# Altium PCB M26_M_V2.0.1.PcbDoc
Units mil, origin at the board's own origin, x right, y up, seen from the top; angles counter-clockwise.
Board outline 1771.65 x 1771.65 mil, 2 copper layers (Top Layer, Bottom Layer); 74 components, 43 nets, 212 pads, 89 vias.
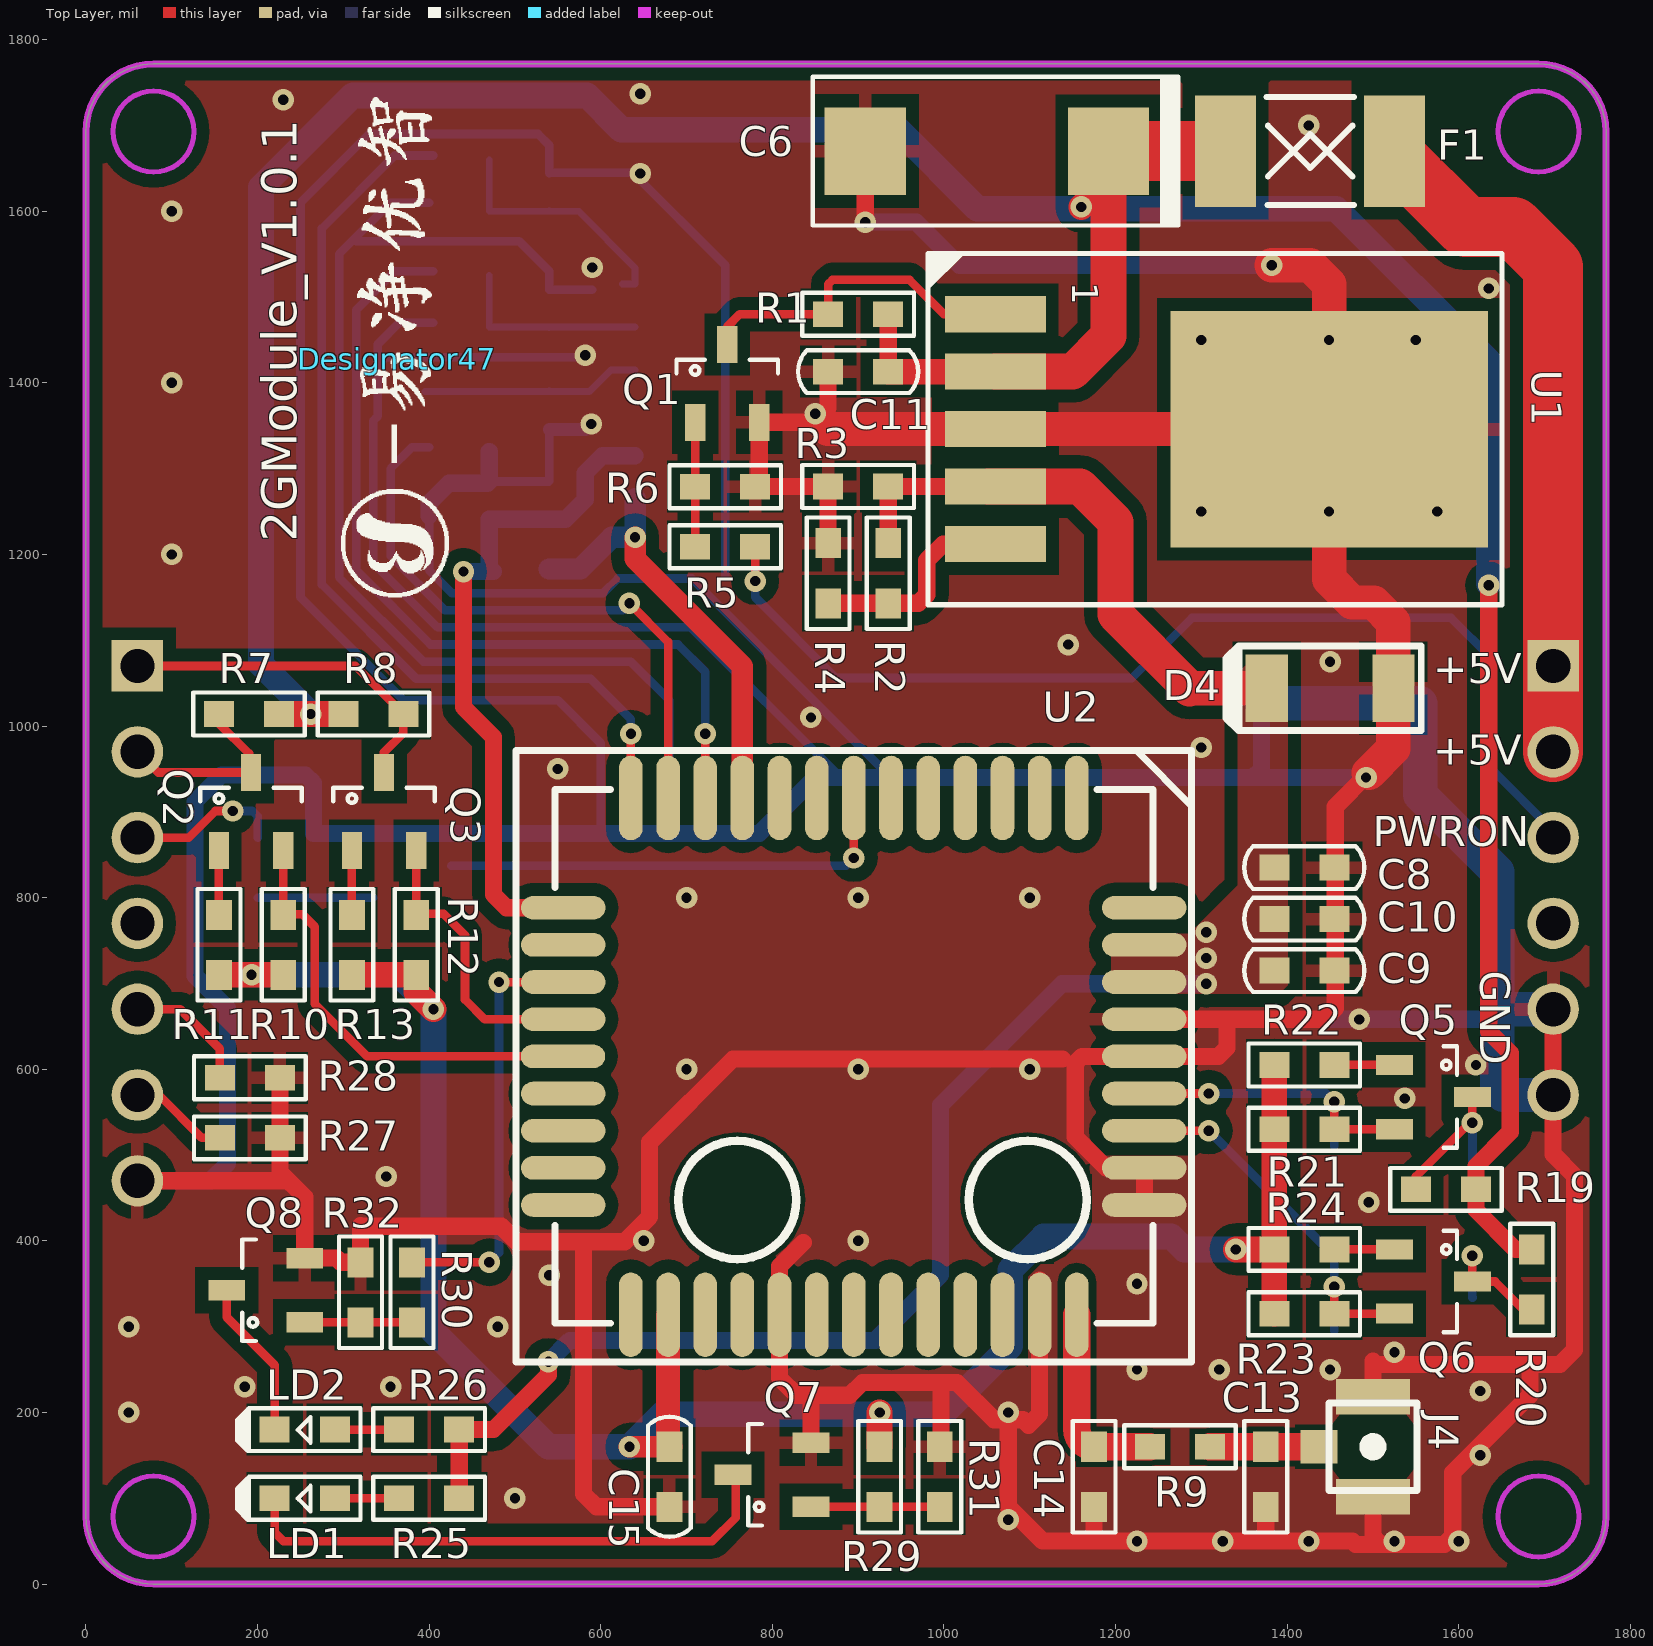
[diagram p0: Top Layer view]
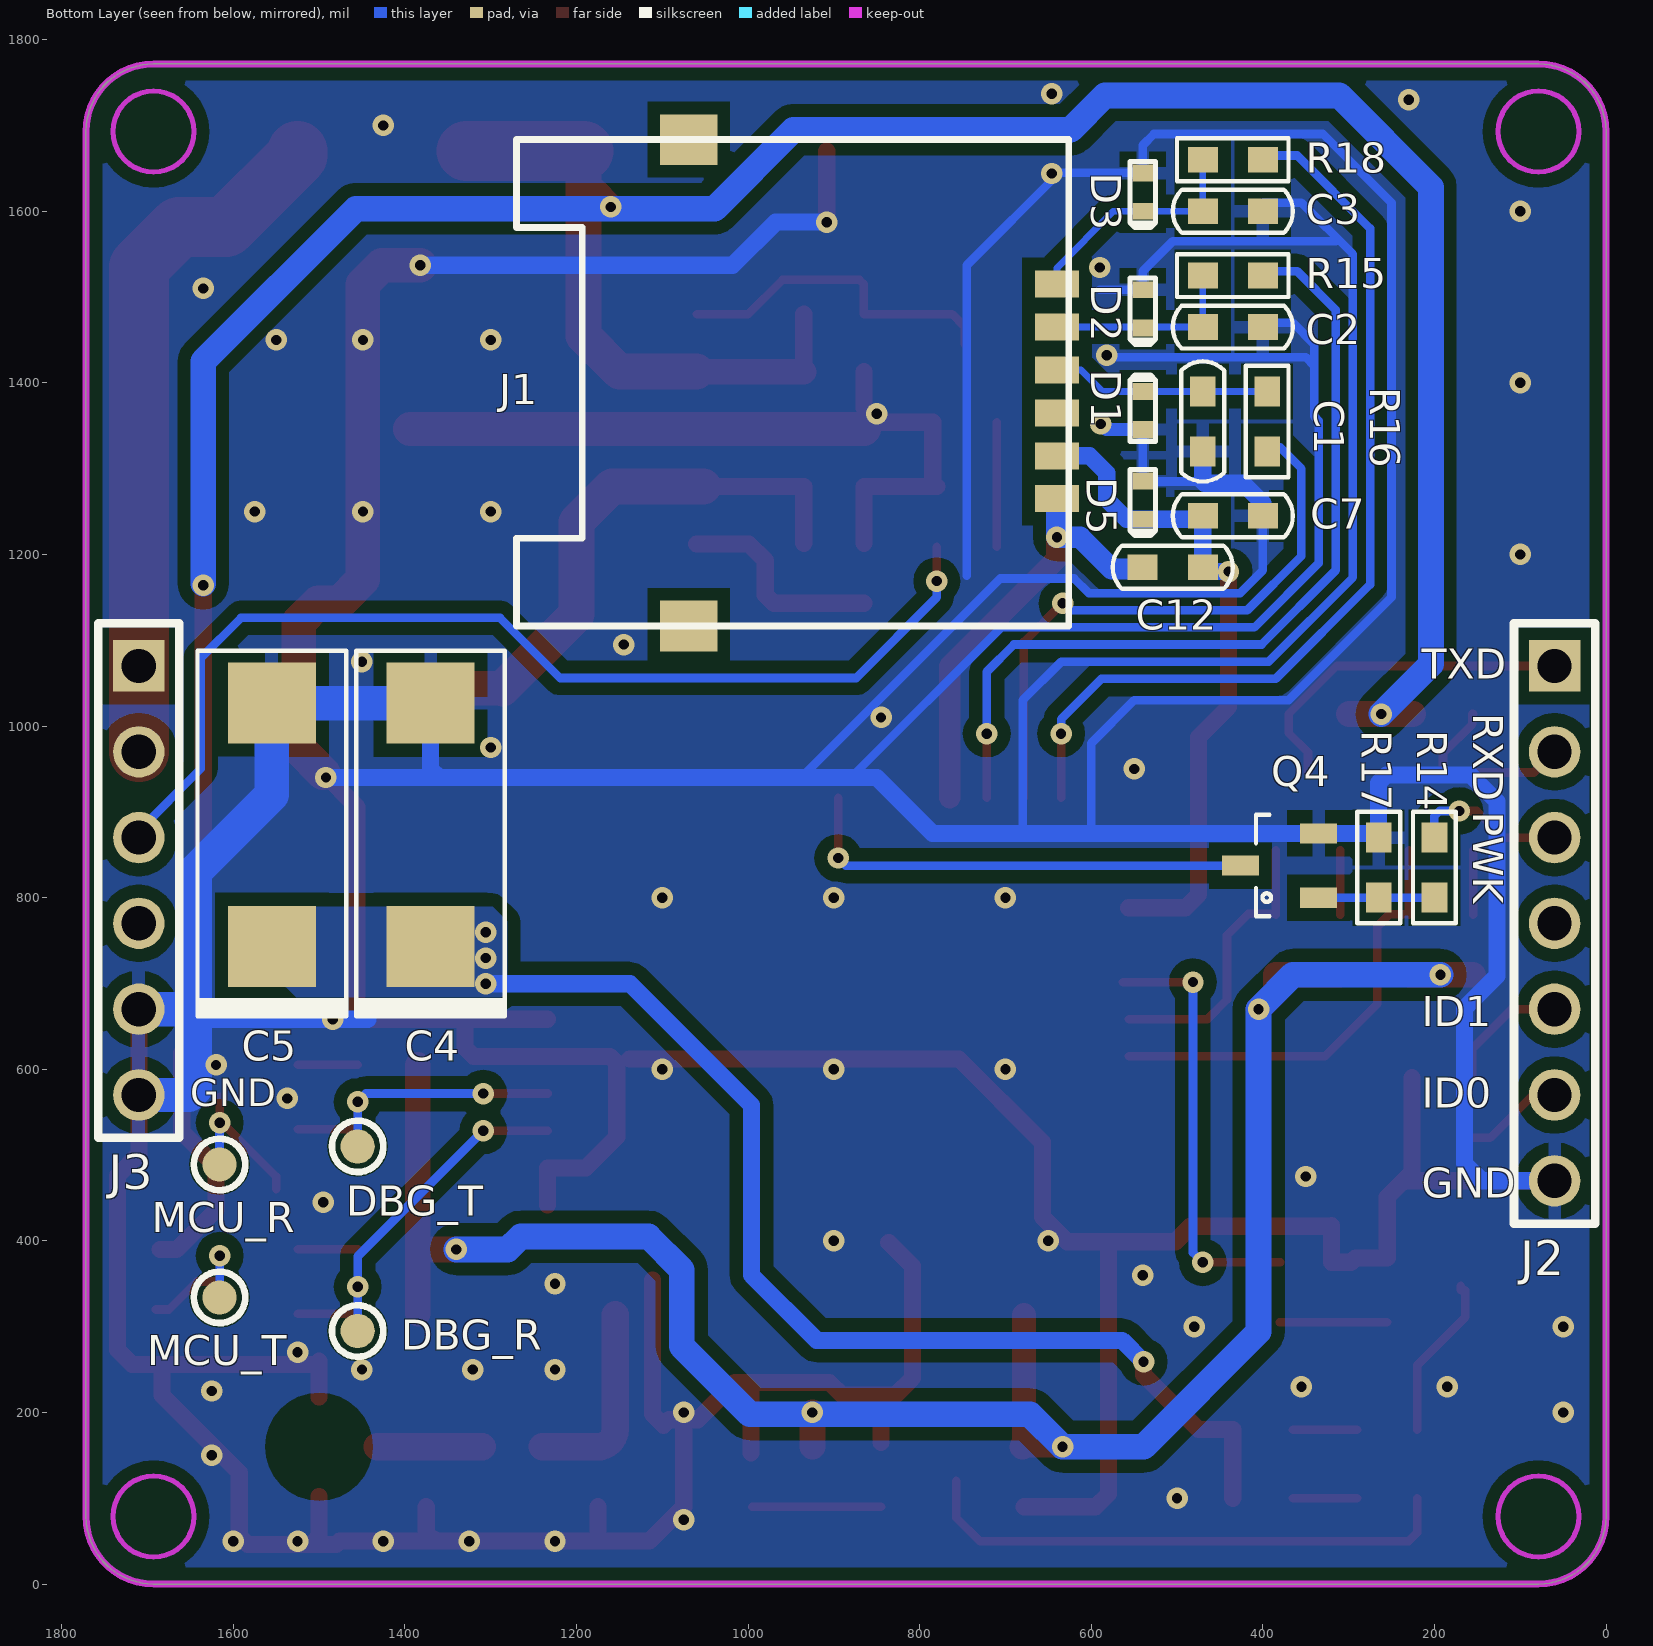
[diagram p1: Bottom Layer view, seen from below]

## Layer stack, top to bottom
Top Layer: signal copper 1.4
Dielectric: dielectric 12.6, FR-4, Dk 4.8
Bottom Layer: signal copper 1.4

## Board outline
0,78.74 ccw(c78.74,78.74) 78.74,0 1692.91,0 ccw(c1692.91,78.74) 1771.65,78.74 1771.65,1692.91 ccw(c1692.91,1692.91) 1692.91,1771.65 78.74,1771.65 ccw(c78.74,1692.91) 0,1692.91

## Design rules (kind name [scope] priority, off if disabled: settings)
Clearance [All] p1: gap=6
ComponentClearance [All] p1: gap=5 collisioncheckmode=0 verticalgap=10
PlaneClearance [All] p1: clearance=5.91
PlaneConnect [All] p1: planeconnectstyle=Relief reliefexpansion=20 reliefentries=4 reliefconductorwidth=20 reliefairgap=10
PolygonConnect [All] p1: connectstyle=Relief reliefconductorwidth=15 reliefentries=4 polygonreliefangle="90 Angle"
RoutingCorners [All] p1: cornerstyle=Round minsetback=393.7 maxsetback=393.7
RoutingVias [All] p1: holewidth=28 width=50 viastyle="Through Hole" minholewidth=12 minwidth=25 maxholewidth=50 maxwidth=50
SolderMaskExpansion [All] p1: expansion=4
TestPointUsage [All] p1: valid=0 allowmultiple=FALSE
Testpoint [All] p1: side=15 testpointundercomponent=TRUE minsize=40 maxsize=100 preferedsize=60 minholesize=0 maxholesize=40 preferedholesize=32 testpointgrid=1 style=1021 order=0123456789
Width [All] p1: maxlimit=100 minlimit=8 preferedwidth=10 minimp=50.000000 maximp=50.000000 favimp=50.000000
15 further rules are at their usual default settings.

## Components (designator, comment, footprint, x,y, rotation, side; value= is the part's Value field where it differs from the comment)
C1 "33PF" 0603_C 470,1320 r90 bottom
C2 "33PF" 0603_C 400,1465 r0 bottom
C3 "33PF" 0603_C 400,1600 r0 bottom
C4 "220uF/16V" C_TAN_D 1370,885 r90 bottom
C5 "220uF/16V" C_TAN_D 1555,885 r90 bottom
C6 "220uF/16V" C_TAN_D 1050,1670 r180 top
C7 "33PF" 0603_C 400,1245 r0 bottom
C8 "0.1uF" 0603_C 1455,835 r180 top
C9 "33P" 0603_C 1455,715 r180 top
C10 "10P" 0603_C 1455,775 r180 top
C11 "0.1uF" 0603_C 865,1413.07 r0 top
C12 "0.1uF" 0603_C 470,1185 r0 bottom
C13 "NC" 0603_r 1375,160 r270 top
C14 "NC" 0603_r 1175,160 r270 top
C15 "4.7uF" 0603_C 680,160 r270 top
D1 "ESD9M5.0ST5G" SOD-923 540,1390 r270 bottom
D2 "ESD9M5.0ST5G" SOD-923 540,1464 r90 bottom
D3 "ESD9M5.0ST5G" SOD-923 540,1600 r90 bottom
D4 "BZV55C4V3" SOD-80 1450,1044 r180 top
D5 "ESD9M5.0ST5G" SOD-923 540,1241 r90 bottom
DBG_R "Component_1" TP-40 1455,295 r270 bottom (schematic designator TP4)
DBG_T "Component_1" TP-40 1455,510 r90 bottom (schematic designator TP3)
Designator47 "Comment" PIC_AIRFACTORY-1500 363,1428 r90 top
F1 "Fuse 2A" 1812_F 1525,1670 r180 top
J1 "SIM_Card" MicroSIM-6 640,1265 r90 bottom locked
J2 "CON7" SIP7 60,1070 r270 bottom locked (schematic designator J4)
J3 "CON6" SIP6 1710,1070 r270 bottom locked (schematic designator J6)
J4 "CON2" RF-Z 1500,160 r270 top
LD1 "WHITE" LED_0603 290,100 r180 top
LD2 "WHITE" LED_0603 290,180 r180 top
MCU_R "Component_1" TP-40 1616,489 r180 bottom (schematic designator TP1)
MCU_T "Component_1" TP-40 1616,334 r90 bottom (schematic designator TP2)
Q1 "2N3904" SOT23 710,1354 r90 top
Q2 "BSS138" SOT23 155,855 r90 top
Q3 "BSS138" SOT23 310,855 r90 top
Q4 "2N3904" SOT23 335,800 r0 bottom
Q5 "BSS138" SOT23 1525,605 r0 top
Q6 "BSS138" SOT23 1525,390 r0 top
Q7 "2N3904" SOT23 845,90 r180 top
Q8 "2N3904" SOT23 255,305 r180 top
R1 "51K" 0603_R 935,1480 r180 top
R2 "124K" 0603_R 935,1143.07 r90 top
R3 "750R" 0603_R 865,1279.21 r0 top
R4 "56K" 0603_R 865,1143.07 r90 top
R5 "4.7K" 0603_R 780,1209 r180 top
R6 "47K" 0603_R 710,1279 r0 top
R7 "10K" 0603_R 225,1014 r180 top
R8 "10K" 0603_R 300,1014 r0 top
R9 "0R" 0603_r 1240,160 r0 top
R10 "10K" 0603_R 230,710 r90 top
R11 "10K" 0603_R 155,710 r90 top
R12 "10K" 0603_R 385,710 r90 top
R13 "10K" 0603_R 310,710 r90 top
R14 "4.7K" 0603_R 200,870 r270 bottom
R15 "22R" 0603_R 470,1525 r180 bottom
R16 "22R" 0603_R 395,1390 r270 bottom
R17 "47K" 0603_R 265,800 r90 bottom
R18 "22R" 0603_R 470,1660 r180 bottom
R19 "10K" 0603_R 1620,460 r180 top
R20 "10K" 0603_R 1685,390 r270 top
R21 "10K" 0603_R 1385,530 r0 top
R22 "10K" 0603_R 1385,605 r0 top
R23 "10K" 0603_R 1385,315 r0 top
R24 "10K" 0603_R 1385,390 r0 top
R25 "1K" 0603_R 435,100 r180 top
R26 "1K" 0603_R 435,180 r180 top
R27 "0R" 0603_R 156,520 r0 top
R28 "0R" 0603_R 156,590 r0 top
R29 "4.7K" 0603_R 925,160 r270 top
R30 "4.7K" 0603_R 380,375 r270 top
R31 "47K" 0603_R 995,90 r90 top
R32 "47K" 0603_R 320,305 r90 top
U1 "MIC29302" TO-263-5 1060,1480 r270 top
U2 "M26" M26 895,615 r270 top

## Footprints (in the part's own frame and the unit in brackets; to place one, negate y for a bottom-side part, rotate by r counter-clockwise, add the part's x,y. Pads: shape width x height; smd on the part's side, far side on the other; paste and mask are expansions set on the pad)
0603_C [mil]
  rect 35x30 smd: 1(0,0) 2(70,0)
  silkscreen extent -35,-25 105,25, body extent 5,-15 65,15, height 39
0603_r [mil]
  rect 35x30 smd: 1(0,0) 2(70,0)
  silkscreen extent -30,-25 100,25, body extent 5,-15 65,15, height 39
0603_R [mil]
  rect 35x30 smd: 1(0,0) 2(70,0)
  silkscreen extent -30,-25 100,25, body extent 5,-15 65,15, height 39
1812_F [mm]
  rect 1.8x3.3 smd: 1(0,0) 2(5,0)
  silkscreen extent 1.2,-1.6 3.78,1.6
C_TAN_D [mm]
  rect 2.4x2.6 smd: 1(-3.6,0) 2(3.6,0)
  silkscreen extent -5.67,-2.2 5.15,2.2, body extent -3.67,-2.2 3.53,2.2, height 4.3
LED_0603 [mil]
  rect 35x30 smd: A(0,0) K(70,0)
  silkscreen extent -30,-25 114,25
M26 [mm]
  oval 2.5x0.7 smd: 1(-7.65,6.6) 2(-7.65,5.5) 3(-7.65,4.4) 4(-7.65,3.3) 5(-7.65,2.2) 6(-7.65,1.1) 7(-7.65,0) 8(-7.65,-1.1) 9(-7.65,-2.2) 10(-7.65,-3.3) 11(-7.65,-4.4) 12(-7.65,-5.5) 13(-7.65,-6.6) 23(7.65,-6.6) 24(7.65,-5.5) 25(7.65,-4.4) 26(7.65,-3.3) 27(7.65,-2.2) 28(7.65,-1.1) 29(7.65,0) 30(7.65,1.1) 31(7.65,2.2) 32(7.65,3.3) 33(7.65,4.4) 34(7.65,5.5) 35(7.65,6.6)
  oval 0.7x2.5 smd: 14(-4.4,-8.6) 15(-3.3,-8.6) 16(-2.2,-8.6) 17(-1.1,-8.6) 18(0,-8.611) 19(1.1,-8.6) 20(2.2,-8.6) 21(3.3,-8.6) 22(4.4,-8.6) 36(4.4,8.6) 37(3.3,8.6) 38(2.2,8.6) 39(1.1,8.6) 40(0,8.6) 41(-1.1,8.6) 42(-2.2,8.6) 43(-3.3,8.6) 44(-4.4,8.6)
  silkscreen extent -9.05,-10 9.05,10
MicroSIM-6 [mm]
  rect 1.5x1.7 smd: 0(-3.77,10.9) 0(10.63,10.9)
  rect 0.8x1.3 smd: 1(1.27,0) 2(3.81,0) 3(6.35,0) 5(0,0) 6(2.54,0) 7(5.08,0)
  silkscreen extent -3.77,-0.35 10.63,16
PIC_AIRFACTORY-1500 [mil]
  silkscreen extent -278,-60 305,65
RF-Z [mm]
  rect 1x1.1 smd: 1(0,-1.6)
  rect 1.05x2.2 smd: 2(-1.475,0) 2(1.475,0)
  silkscreen extent -1.3,-1.3 1.3,1.3
SIP6 [mil]
  rect 60x60 hole 40: 1(0,0)
  round 60 hole 40: 2(100,0) 3(200,0) 4(300,0) 5(400,0) 6(500,0)
  silkscreen extent -50,-47 550,47
SIP7 [mil]
  rect 60x60 hole 40: 1(0,0)
  round 60 hole 40: 2(100,0) 3(200,0) 4(300,0) 5(400,0) 6(500,0) 7(600,0)
  silkscreen extent -50,-47 650,47
SOD-80 [mm]
  rect 1.25x2 smd: 1(-1.875,0) 2(1.875,0)
  silkscreen extent -2.7,-1.25 3.08,1.25
SOD-923 [mm]
  rect 0.5x0.6 smd: 1(1.129,0) 2(0,0)
  silkscreen extent -0.48,-0.38 1.47,0.38
SOT23 [mm]
  rect 1.092x0.6 smd: 1(0,0) 2(0,-1.9) 3(2.308,-0.95)
  silkscreen extent 1.41,-2.45 1.85,0.55, body extent 0.45,-2.45 1.85,0.55, height 1.1
TO-263-5 [mm]
  rect 1.07x3 smd: 1(0,0) 2(1.7,0) 3(3.4,0) 4(5.1,0) 5(6.8,0)
  rect 7x9.4 smd: 6(3.41,9.878)
  silkscreen extent -1.8,-2 8.6,15, body extent 0,0 6.8,12.6, height 4.5
TP-40 [mil]
  round 40 smd: 1(0,0)
  silkscreen extent -30,-30 30,30

## Part data
C1 C2 C3 C7 C12 C13 C14 C15: library part CAP, "CAP"
C4 C5 C6: library part ECAP, "E-CAP"
C8 C9 C10 C11: library part "Cap Semi", "Capacitor"
D1 D2 D3 D4 D5: library part "DIODE SCHOTTKY"
F1: library part "Fuse 1", "Fuse"
J2: library part CON8
J3: library part CON7
LD1 LD2: library part LED, "LED"
Q1 Q4 Q7 Q8: library part NPN
Q2 Q3 Q5 Q6: library part "N-Channel Enhancement MOSFET", "N-Channel Enhancement MOSFET"
R1 R2 R4 R15 R16 R18: library part R0.25W, "RESISTOR"
R3 R5 R6 R14 R17 R25 R26 R27 R28 R29 R30 R31 R32: library part RES1
R7 R8 R9 R10 R11 R12 R13 R19 R20 R21 R22 R23 R24: library part Res3_3, "Resistor"

## Via types
v1: diameter 25, hole 12, Top Layer to Bottom Layer, tented both sides, 89 vias

## Nets (pads, with @x,y where several pads share a name; then routed paths per layer and width w, separated by ;. In a path a pad name is that pad's centre, name@x,y a point inside that pad or via, vN(x,y) a via of type N, cw(c..) or ccw(c..) an arc to the next point about the centre after c; other vN are vias at no path point)
+4V: C4.1 C5.1 C8.2 C9.2 C10.2 D4.2 R2.2 R3.2 R25.1 R26.1 U1.4 U2.42 U2.43 | length 1964.6
  Top Layer w20: R25.1 R26.1 475,180 539,244 v1(539,259) ; R2.2 R3.2 U1.4
  Top Layer w40: 1286,1044 D4.2
  Top Layer w42: U1.4@1052,1279.21 1158.79,1279.21 1200,1238 1200,1130 1286,1044
  Bottom Layer w20: v1(539,259) 564,284 920,284 996,360 996,558 1137.61,699.61 v1@1303.58,699.61
  other v1: 1305.58,699.61 1305.58,729.61 1305.58,759.61
+5V: C6.1 C11.2 F1.2 R1.1 R7.1 R8.1 R19.1 R20.1 U1.2 | length 4135.6
  Top Layer w20: C11.2 R1.1 ; v1(1635,1164) 1635,644 1660,619 1660,527 1620,487 1620,436 1666,390 R20.1
  Top Layer w30: R7.1 R8.1 ; C11.2 U1.2 ; v1(1160,1605) C6.1@1180,1625
  Top Layer w42: U1.2 1150,1413.07 1191.73,1454.8 C6.1
  Top Layer w70: C6.1 F1.2
  Bottom Layer w30: v1(262,1014) 204,1072 204,1628 311,1735 584,1735 624,1695 947,1695 1039,1603 1457,1603 1635,1425 v1@1635,1166
DBG_RXD: DBG_R.1 Q6.2 R23.2 U2.38 | length 470.7
  Top Layer w10: U2.38 v1(1308.58,528.39) ; v1(1455,346.57) R23.2 1524.8,315 Q6.2
  Bottom Layer w10: v1(1308.58,528.39) 1455,381.97 DBG_R.1
DBG_TXD: DBG_T.1 Q5.2 R21.2 U2.39 | length 379.5
  Top Layer w10: U2.39 v1(1308.58,571.69) ; v1(1455,562) R21.2 1524.8,530 Q5.2
  Bottom Layer w10: v1(1308.58,571.69) 1445.31,571.69 v1(1455,562) DBG_T.1
GND: C1.1 C2.1 C3.1 C4.2 C5.2 C6.2 C7.1 C8.1 C9.1 C10.1 C11.1 C13.2 C14.2 C15.2 D1.1 D2.1 D3.1 D4.1 D5.1 J2.7 J3.5 J3.6 J4.2 Q1.2 Q4.2 Q7.2 Q8.2 R3.1 R4.2 R6.2 R17.2 R27.2 R28.2 R31.2 R32.2 U1.3 U1.6 U2.27 U2.34 U2.36 U2.37 U2.40 U2.41 | length 16275.9
  Top Layer w20: J2.7 236,470 ; R28.2 R27.2 226,480 255,451 Q8.2 292.2,379.8 297,375 R32.2 320,418 321,417 484,417 502,399 628,399 657,428 657,515 754,612 1138,612 ; 580,394 580,105 595,90 C15.2@678.46,90 ; 836,398 808.39,370.39 808.39,240 828.39,220 850,220 890,220 905,235 1015,235 1058.46,191.54 1091.93,191.54 1098.46,185 1111.54,198.07 U2.34@1111.54,354.54 ; Q7.2 845,220 ; R4.2 R3.1 864.79,1279 R6.2 784.8,1283.8 Q1.2 848,1354 865,1371 C11.1 ; v1(908.27,1587.27) C6.2 ; R31.2@996.46,153 996.46,226.46 ; v1@1075,191.54 1075,90 1115,50 1476,50 1480,46 1583,46 1593,56 1593,130 1683,220 1683,254 1681,256 ; 1175,50 C14.2 ; U2.36 U2.37 1188.92,485.08 1153,521 1153,607 1161,615 U2.40 1320,615 1330,625 1330,658.31 ; U2.41 1443.31,658.31 1456,671 1456,716.61 1456,906 v1@1495.17,945.17 ; 1365,50 ccw(c1362.59,52.41) 1366,52.41 ; 1375,50 C13.2 ; J4.2@1500,101.93 1500,61 ccw(c1515,61) v1@1515,46 ; J4.2@1500,218.07 1500,260 1504,256 1718,256 1735,273 1735,476 1710,501 J3.5
  Top Layer w40: 864.86,1346.14 U1.6@1393.86,1346.14 ; v1(1382,1537) 1426.76,1537 1448.88,1514.88 1448.88,1171.12 1476,1144 1500.82,1144 1523.82,1121 1523.82,973.82 v1@1495.17,945.17
  Bottom Layer w10: 315.1,1565 505,1565 540,1530 D2.1 590,1508.43 ; 340,1420 350,1430 v1@580,1430 ; C7.1@400,1241 400,1181.42 426.42,1155 603,1155 620,1172 706,1172 938,940 ; C3.1@400,1610 355,1610 295,1550 295,1173.28 393.28,1075 635,1075 680,1030 680,874.8 ; C2.1@405,1470 365,1470 340,1445 340,1361 335,1356 335,1189.85 409.85,1115 705,1115 880,940 ; 470,1285 539.57,1285 D5.1 D1.1 ; D3.1 540,1677 ; 600,874.8 600,980 550,1030 370,1030 250,1150 250,1610 330,1690 527,1690 540,1677 ; 745,1175 745,1537 637,1645 540,1645 540,1677
  Bottom Layer w15: D1.1 582.58,1345.58 v1(589,1352)
  Bottom Layer w20: J2.7 145,470 165,490 165,671 127,709 127,912 158,943 256,943 265.2,933.8 R17.2@265.2,874.8 ; R17.2@265,875 R17.2@265.2,874.8 ; C7.1 400,1260 423,1283 468,1283 470,1285 C1.1 ; v1(908.27,1587.27) 967.73,1587.27 1018,1537 v1(1382,1537) ; 1360,940 1370,950 C4.2 ; 1443.31,658.31 1636.69,658.31 ; v1(1492,940) 850,940 784.8,874.8 R17.2@265.2,874.8
  Bottom Layer w40: C4.2 C5.2 1555,920 1645,830 1645,577 1652,570 J3.6 ; 1647,670 J3.5
  other v1: 1225,50 1325,50 1425,50 1525,50 1600,50 1075,75 500,100 1625,150 50,200 1075,200 1625,225 185,230 355,230 1225,250 1321,250 1450,250 1525,270 50,300 480,300 1225,350 540,360 650,400 900,400 1495,445 350,475 1537,566 700,600 900,600 900,600 1100,600 1620,605 1484,658 700,800 900,800 1100,800 550,950 1300,975 845,1010 1450,1075 1145,1095 100,1200 1300,1250 1448.88,1250 1575,1250 850,1364 100,1400 582,1432 1300,1450 1448.88,1450 1550,1450 1635,1510 590,1534.43 100,1600 646,1644 1425,1700 230,1730 646,1737
ID_0: J2.6 R27.1 | length 116.7
  Top Layer w10: J2.6 85,570 135,520 R27.1
ID_1: J2.5 R28.1 | length 149.1
  Top Layer w10: J2.5 110,670 156,624 R28.1
M26_RXD: Q3.2 R12.2 U2.17 | length 341.5
  Top Layer w10: Q3.2 385,854.8 R12.2 387,781 416.95,781 441.77,756.18 441.77,681.18 464.65,658.31 U2.17
M26_TXD: Q2.2 R10.2 U2.18 | length 522.5
  Top Layer w10: Q2.2 230,854.8 R10.2@230,780.8 ; R10.2 R10.2@230,780.8 ; U2.18 327.95,615 266.77,676.18 266.77,766.18 252.15,780.8 R10.2@230,780.8
NetC13_1: C13.1 J4.1 R9.2 | length 122
  Top Layer w32: R9.2 J4.1@1432.01,160
NetC14_1: C14.1 R9.1 U2.35 | length 230.3
  Top Layer w32: U2.35 1154.84,180.16 ccw(c1175,180.16) C14.1 R9.1
NetLD1_A: LD1.A R25.2 | length 75
  Top Layer w10: LD1.A R25.2
NetLD1_K: LD1.K Q7.3 | length 635.8
  Top Layer w10: LD1.K 220,60 230,50 730,50 757.13,77.13 Q7.3@757.13,120.4
NetLD2_A: LD2.A R26.2 | length 75
  Top Layer w10: LD2.A R26.2
NetLD2_K: LD2.K Q8.3 | length 195.5
  Top Layer w10: Q8.3@169.13,347.4 169.13,342.4 Q8.3 164.13,310.87 220,255 LD2.K
NETLIGHT: R30.1 U2.16 | length 503.3
  Top Layer w10: R30.1 v1(470,375) ; v1(481.42,701.61) U2.16@563.39,701.61
  Bottom Layer w10: v1(470,375) 481.42,386.42 v1(481.42,701.61)
NetQ1_1: Q1.1 R5.2 R6.1 | length 145
  Top Layer w10: R5.2 R6.1 Q1.1
NetQ1_3: Q1.3 R1.2 U1.1 | length 392.9
  Top Layer w10: Q1.3 747.4,1465.5 761.77,1479.87 864.87,1479.87 R1.2 865,1515 870,1520 960,1520 1000,1480 U1.1
NetQ2_1: Q2.1 R11.2 | length 75
  Top Layer w10: R11.2 Q2.1
NetQ3_1: Q3.1 R13.2 | length 75
  Top Layer w10: R13.2 Q3.1
NetQ4_1: Q4.1 R14.2 R17.1 | length 135
  Bottom Layer w10: R14.2 Q4.1
NetQ4_3: Q4.3 U2.7 | length 542.8
  Top Layer w10: v1(895,846.18) U2.7
  Bottom Layer w10: Q4.3 886.22,837.4 v1(895,846.18)
NetQ5_1: Q5.1 R22.2 | length 70
  Top Layer w10: R22.2 Q5.1
NetQ6_1: Q6.1 R24.2 | length 70
  Top Layer w10: R24.2 Q6.1
NetQ7_1: Q7.1 R29.2 R31.1 | length 150
  Top Layer w10: Q7.1 R31.1
NetQ8_1: Q8.1 R30.2 R32.1 | length 125
  Top Layer w10: Q8.1 R30.2
NetR2_1: R2.1 R4.1 U1.5 | length 247.1
  Top Layer w20: R4.1 R2.1 970,1143.07 980,1153.07 980,1193.07 999.21,1212.28 U1.5
NetR15_2: R15.2 U2.11 | length 1014.9
  Top Layer w10: U2.11 v1(721.77,991.18)
  Bottom Layer w10: R15.2@405,1530 360,1530 315,1485 315,1181.57 401.57,1095 690,1095 721.77,1063.23 v1(721.77,991.18)
NetR16_2: R16.2 U2.12 | length 710.6
  Top Layer w10: v1(633.46,1143) 678.46,1098 U2.12
  Bottom Layer w10: R16.2@400,1325 380,1325 355,1300 355,1198.14 418.14,1135 625.46,1135 v1(633.46,1143)
NetR18_2: R18.2 U2.13 | length 1097.1
  Top Layer w10: U2.13 v1(635.16,991.18)
  Bottom Layer w10: R18.2@405,1665 360,1665 275,1580 275,1165 385,1055 588,1055 635.16,1007.84 v1(635.16,991.18)
PWRKEY: J2.3 R14.1 | length 180.3
  Top Layer w10: J2.3 120,870 151,901 v1(171,901)
  Bottom Layer w10: v1(171,901) 194,901 200,895 R14.1
PWRON: J3.3 R5.1 | length 1243.2
  Top Layer w10: v1(780,1169) R5.1
  Bottom Layer w10: v1(780,1169) 780,1150 874,1056 1219,1056 1289,1126 1591,1126 1638,1079 1638,950 1710,878 J3.3
RXD1_MCU: MCU_R.1 Q5.3 R19.2 | length 183.6
  Top Layer w10: R19.2 1550,475 1615.87,540.87 Q5.3
  Bottom Layer w10: v1(1615.87,537.6) cw(c1615.87,537.46) 1616,537.46 MCU_R.1
RXD_MCU: J2.2 Q2.3 R7.2 | length 226.3
  Top Layer w10: J2.2 84.13,945.87 Q2.3@188.4,945.87 ; R7.2 156,1014 156,1001.95 190,967.95 190,947.46 Q2.3@188.4,945.87 ; Q2.3 Q2.3@188.4,945.87
SIM_CLK: C3.2 D3.2 J1.3 R18.1 | length 292.1
  Bottom Layer w8: R18.1 C3.2 574,1600 640,1534 J1.3 J1.3@625,1515 ; D3.2@539.43,1600 D3.2@540,1600.57
SIM_DATA: C2.2 D2.2 J1.7 R15.1 | length 230.6
  Bottom Layer w8: R15.1 C2.2 J1.7 ; D2.2@539.57,1465 D2.2@540,1464.57
SIM_GND: C12.2 J1.5 U2.10 | length 516
  Top Layer w25: v1(640,1220) 640,1195 765.08,1069.92 U2.10
  Bottom Layer w25: C12.2@540,1183 576,1183 613,1220 v1(640,1220) J1.5
SIM_RST: C1.2 D1.2 J1.2 R16.1 | length 256
  Bottom Layer w8: R16.1 587,1390 612,1415 J1.2 ; D1.2@539.57,1390 D1.2@540,1390.43
SIM_VDD: C7.2 C12.1 D5.2 J1.1 U2.14 | length 783.6
  Top Layer w20: v1(440,1180) 440,1022 475,987 475,803.46 490.24,788.23 U2.14
  Bottom Layer w20: v1@450,1180 C12.1@475,1180 ; C12.1@470,1180 470,1241 559,1241 582,1264 582,1295 602,1315 J1.1
TXD1_MCU: MCU_T.1 Q6.3 R20.2 | length 166.3
  Top Layer w10: v1(1615.87,382.6) Q6.3 1642.4,352.6 1675,320 R20.2@1690,320
  Bottom Layer w10: v1(1615.87,382.6) 1615.87,334.13 MCU_T.1
TXD_MCU: J2.1 Q3.3 R8.2 | length 410.7
  Top Layer w10: J2.1 314,1070 R8.2 370,992 347.4,969.4 Q3.3
VCC_5V: F1.1 J3.1 J3.2 | length 808.8
  Top Layer w70: F1.1 1525,1665 1608.42,1581.58 1663.42,1581.58 1710,1535 J3.1 J3.2
VDD_EXT: C15.1 R10.1 R11.1 R12.1 R13.1 R21.1 R22.1 R23.1 R24.1 R29.1 U2.24 | length 2527.6
  Top Layer w25: v1(633.46,160) C15.1@678.46,160
  Top Layer w28: C15.1@678.46,161.54 U2.24
  Top Layer w30: R11.1 R10.1 ; R13.1 R12.1 385,690 v1(405,670) ; C15.1@678.46,161.54 C15.1 ; R29.1 v1(925,200) ; v1(1340,390) R24.1 ; R23.1 R22.1
  Bottom Layer w30: v1(193,710) 365,710 v1(405,670) 405,294 539,160 v1(633.46,160) 671.46,198 998,198 1077.21,277.21 1077.21,366.21 1116,405 1265,405 1280,390 v1(1340,390)
pads on no net: J1.0 J1.6 J2.4 J3.4 U2.1 U2.2 U2.3 U2.4 U2.5 U2.6 U2.8 U2.9 U2.15 U2.19 U2.20 U2.21 U2.22 U2.23 U2.25 U2.26 U2.28 U2.29 U2.30 U2.31 U2.32 U2.33 U2.44

## Polygon pours and split planes (outlines as drawn)
+4V on Top Layer "Top Layer-No Net 1" (solid, remove dead copper, pour order 1000): 1352,1071 1400.2,1071 1400.58,1070.61 1400.58,697.61 1391.58,688.61 1390.97,688 1380,688 1209,688 1195,702 1195,751 1202,758 1285.97,758 1329.58,801.61 1342.58,814.61 1342.58,897.61 1342.58,1061.58 1352,1071
GND on Top Layer "Top Layer-No Net 2" (solid, remove dead copper, pour order 1000): -43,1847 1747,1847 1877,1717 1877,56 1752,-69 -7,-69 -168,92 -168,1750 -160,1758 -71,1847 -43,1847
GND on Top Layer "Top Layer-No Net" (solid, remove dead copper, pour order 1001): 1348,265 1577,265 1621,221 1583,183 1583,46 1127,46 1109,64 1058.46,114.54 1058.46,191.54 1058.46,204.46 1091,237 1098,244 1098,298 1098,358 1113,373 1132.51,373 1163.39,403.88 1173.01,413.5 1173.01,499.59 1173.6,499 1218,499 1298,499 1309,488 1307,486 1307,321 1307,270 1309,268
+4V on Bottom Layer "Bottom Layer-No Net" (solid, remove dead copper, pour order 1001): 1389.58,789.61 1530.58,789.61 1563.58,756.61 1563.58,720.61 1549.58,706.61 1526.58,683.61 1287.58,683.61 1280.58,690.61 1280.58,772.61 1297.58,789.61 1329.58,789.61
GND on Bottom Layer "Bottom Layer-No Net 1" (solid, remove dead copper, pour order 1002): -105,1823 1814,1823 1893,1744 1893,0 1776,-117 72,-117 -92,47 -92,1732 -40,1784

## Keep-outs
Keep-Out Layer:
  circle w6: c78.74,1692.91 r47.24
  circle w6: c1692.91,78.74 r47.24
  circle w6: c1692.91,1692.91 r47.24
  circle w6: c78.74,78.74 r47.24
  lines w8: 0,78.74 ccw(c78.74,78.74) 78.74,0 1692.91,0 ccw(c1692.91,78.74) 1771.65,78.74 1771.65,1692.91 ccw(c1692.91,1692.91) 1692.91,1771.65 78.74,1771.65 ccw(c78.74,1692.91) 0,1692.91 0,78.74

## Silkscreen, mask and mechanical layers (free items; w line width, h text height)
Top Overlay:
  text "2GModule_V1.0.1" at 259,1215 h70 r90
  text "+5V" at 1570,1050 h35
  text "+5V" at 1570,955 h35
  text "PWRON" at 1500,860 h35
  text "GND" at 1625,715 h35 r270
Bottom Overlay:
  text "TXD" at 215,1055 h35
  text "RXD" at 155,1015 h35 r90
  text "PWK" at 155,900 h35 r90
  text "ID1" at 215,650 h35
  text "GND" at 1650,557 h32
  text "ID0" at 215,555 h35
  text "GND" at 215,450 h35
Mechanical 1:
  circle w6: c1692.91,78.74 r47.24
  circle w6: c78.74,1692.91 r47.24
  circle w6: c1692.91,1692.91 r47.24
  circle w6: c78.74,78.74 r47.24
  lines w8: 0,78.74 ccw(c78.74,78.74) 78.74,0 1692.91,0 ccw(c1692.91,78.74) 1771.65,78.74 1771.65,1692.91 ccw(c1692.91,1692.91) 1692.91,1771.65 78.74,1771.65 ccw(c78.74,1692.91) 0,1692.91 0,78.74

## Text inside footprints (layer, text, board x,y; h text height)
U1: Top Overlay "1" at 1149.72,1517.48 h30 r270